# Altium PCB atWork_Main.PcbDoc
Units mm, origin at the board's own origin, x right, y up, seen from the top; angles counter-clockwise.
Board outline 104.27 x 85.85 mm, 2 copper layers (Top Layer, Bottom Layer); 62 components, 117 nets, 342 pads, 45 vias.
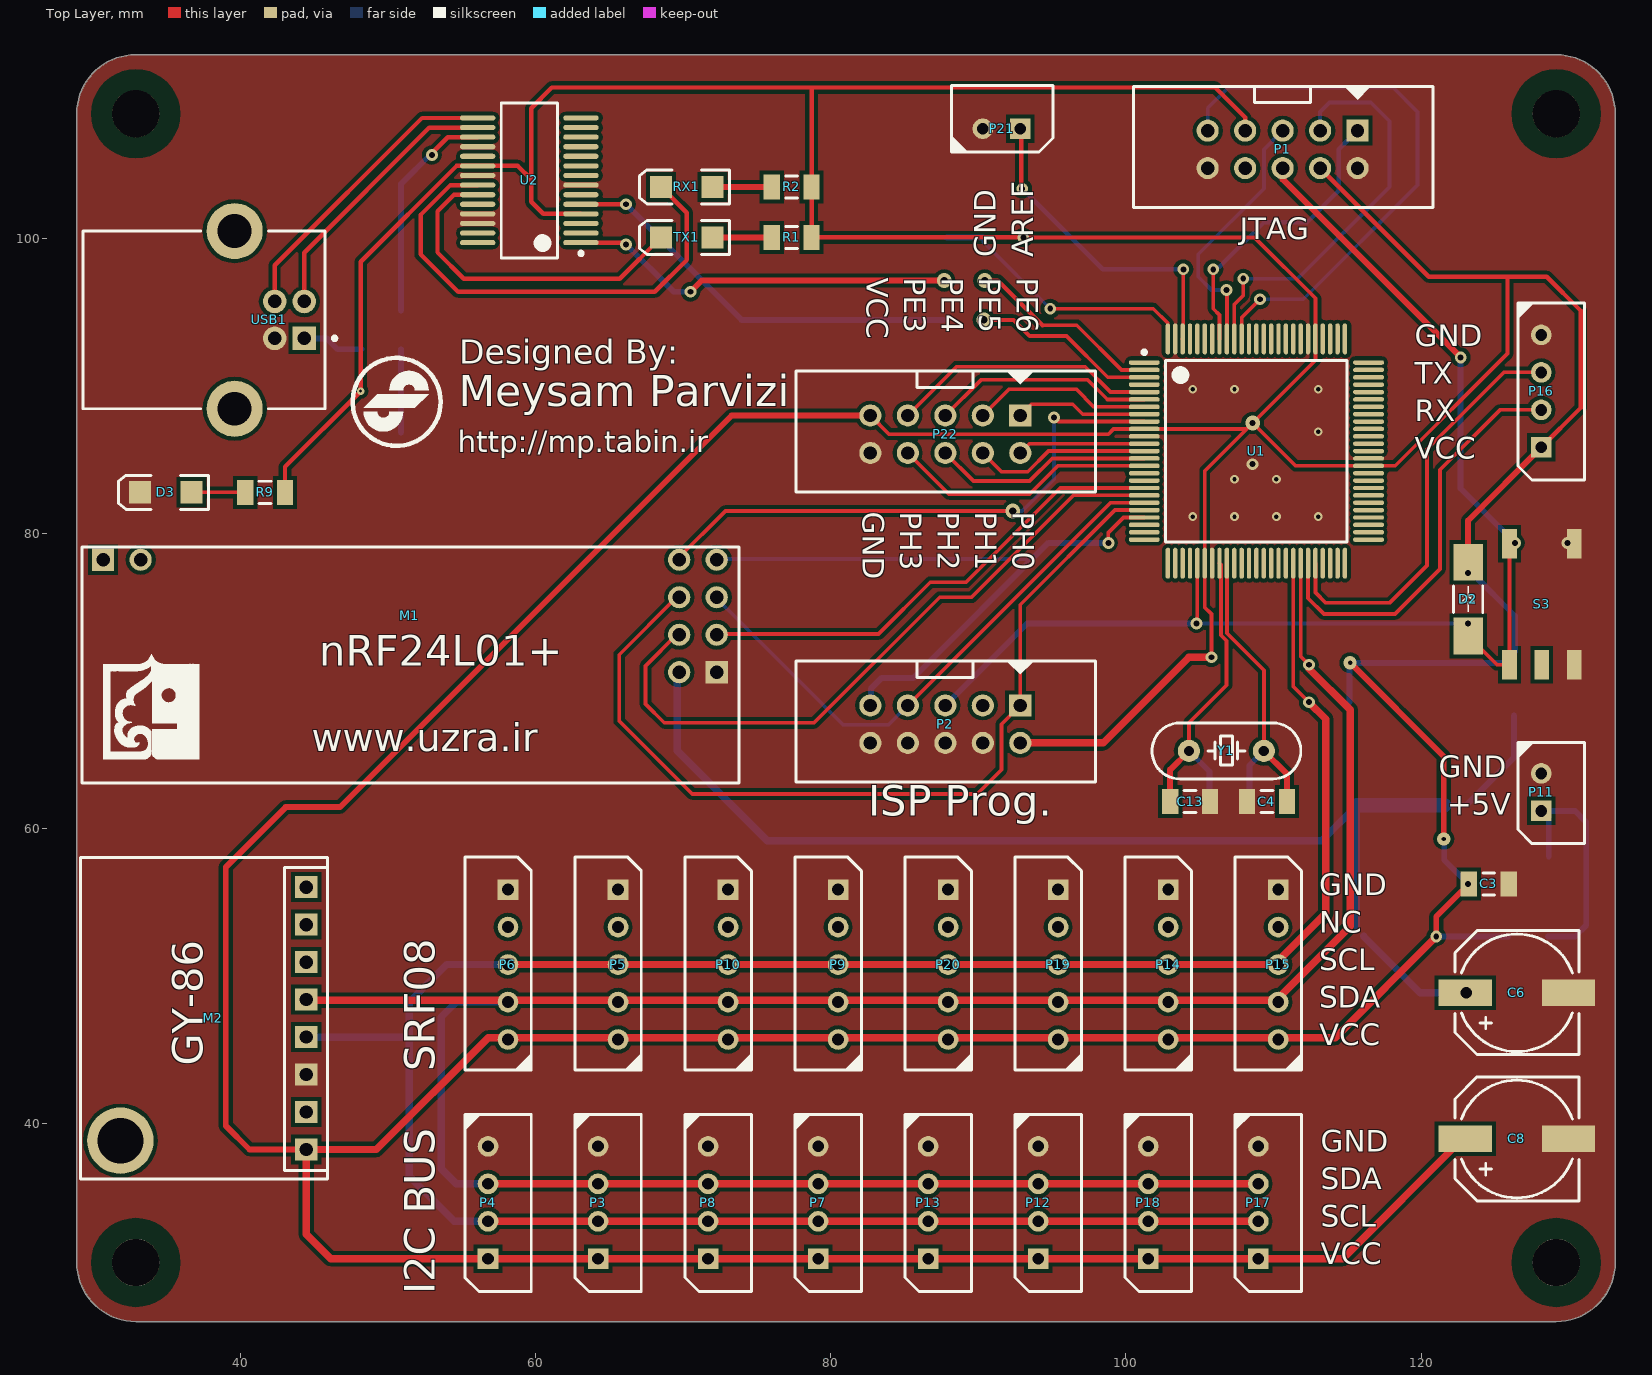
[diagram p0: Top Layer view]
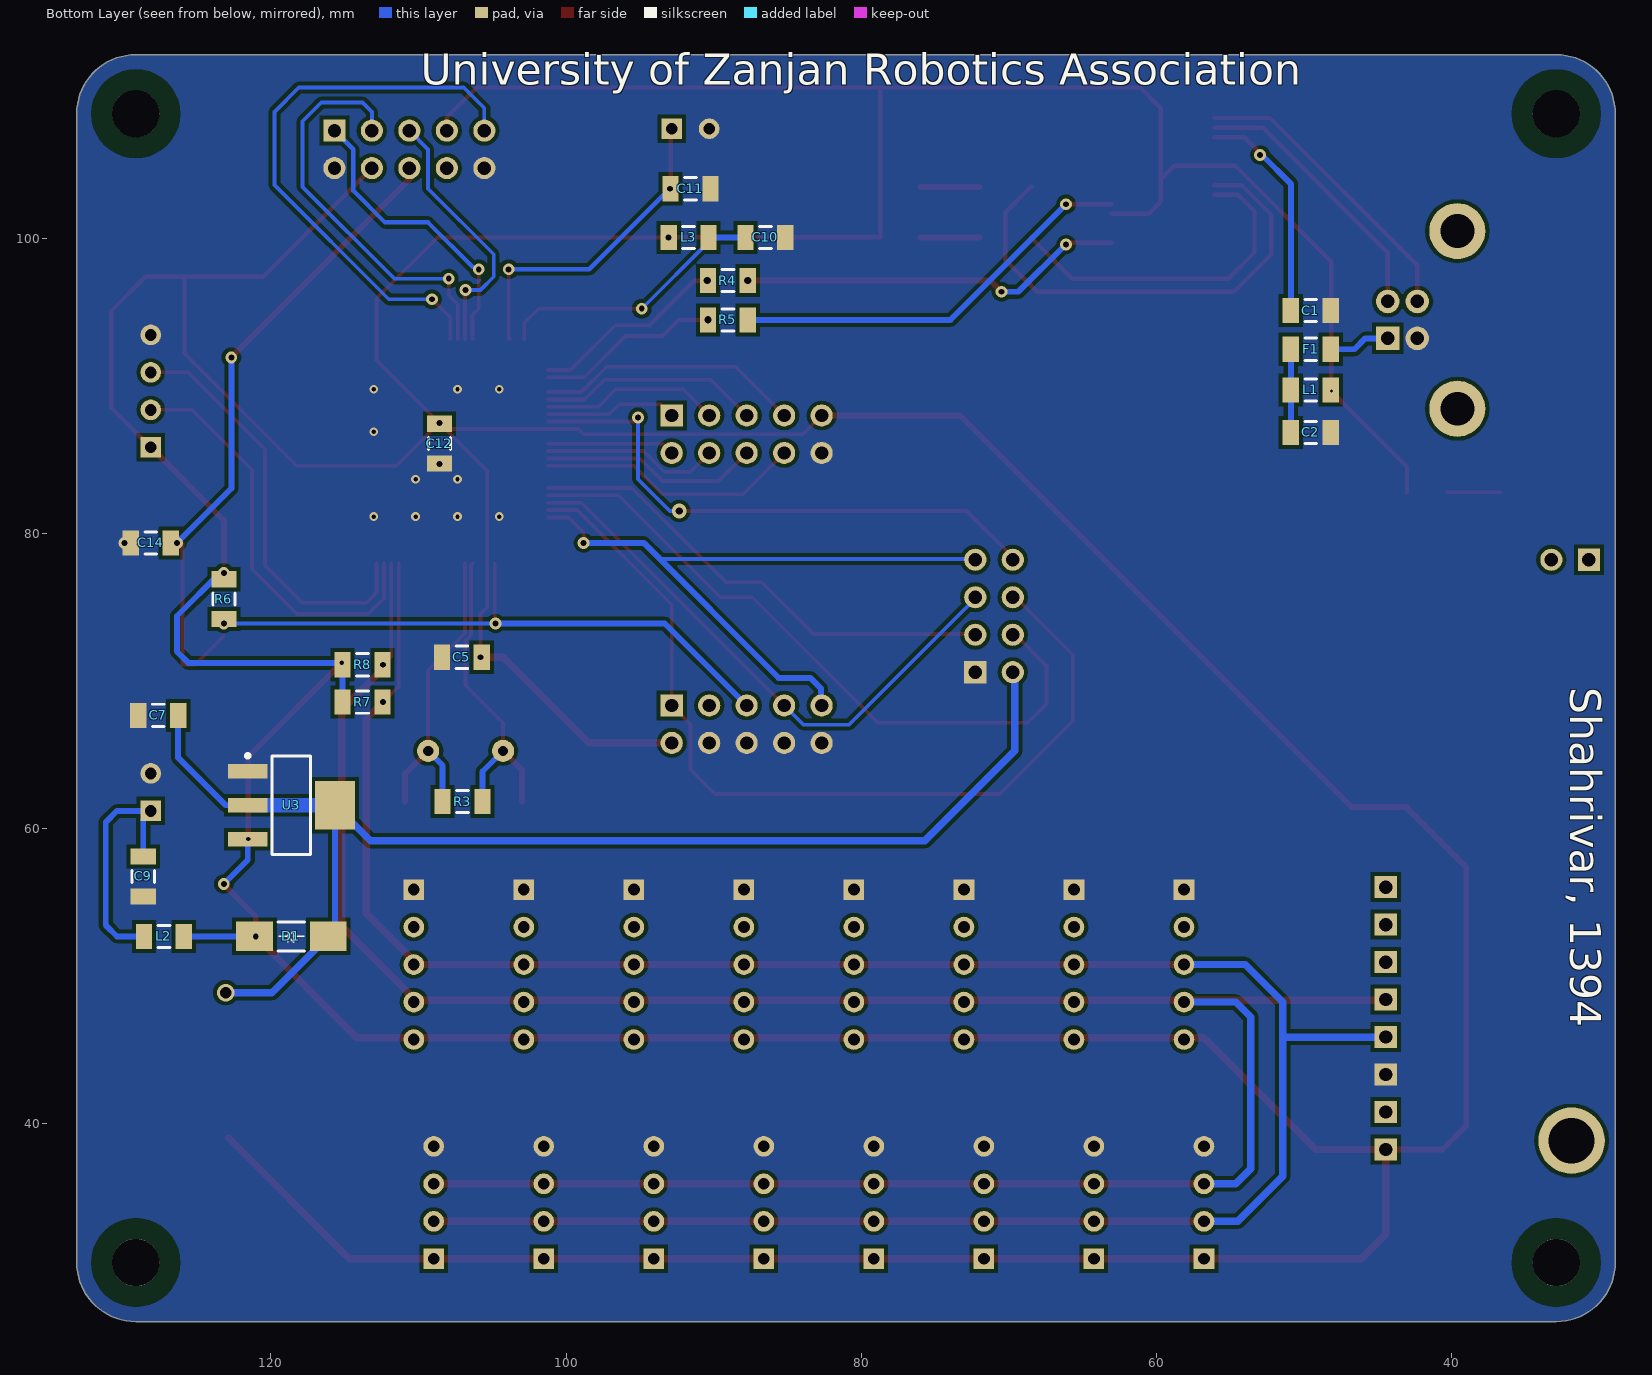
[diagram p1: Bottom Layer view, seen from below]

## Layer stack, top to bottom
Top Solder: solder mask 0.0102, Solder Resist, Dk 3.5
Top Layer: signal copper 0.0356
Dielectric 1: dielectric 0.32, FR-4, Dk 4.8
Bottom Layer: signal copper 0.0356
Bottom Solder: solder mask 0.0102, Solder Resist, Dk 3.5

## Board outline
28.893,30.607 28.893,108.458 cw(c32.893,108.458) 32.893,112.458 129.159,112.458 cw(c129.159,108.458) 133.159,108.458 133.159,30.607 cw(c129.159,30.607) 129.159,26.607 32.893,26.607 cw(c32.893,30.607)

## Design rules (kind name [scope] priority, off if disabled: settings)
Clearance [All] p1: gap=0.254
PolygonConnect [All] p1: connectstyle=Direct reliefconductorwidth=0.254 reliefentries=4 polygonreliefangle="90 Angle" airgapwidth=0.254
RoutingVias [All] p1: holewidth=0.711 width=1.27 viastyle="Through Hole" minholewidth=0.711 minwidth=1.27 maxholewidth=0.711 maxwidth=1.27
SolderMaskExpansion [All] p1: expansion=0.102
Width [All] p1: maxlimit=2 minlimit=0.254 preferedwidth=0.7 minimp=50.000000 maximp=50.000000 favimp=50.000000
30 further rules are at their usual default settings.

## Components (designator, comment, footprint, x,y, rotation, side; value= is the part's Value field where it differs from the comment)
C1 "Cap Semi" C1206 49.53,95.123 r180 bottom
C2 "Cap Semi" C1206 49.53,86.868 r0 bottom
C3 "Cap Semi" C1206 124.587,56.261 r180 top
C4 "Cap" C1206 109.554,61.849 r0 top
C5 "Cap" C1206 107.061,71.628 r180 bottom
C6 "Cap Pol1" CAP-SMD1 126.492,48.895 r180 top
C7 "Cap" C1206 127.635,67.691 r180 bottom
C8 "Cap Pol1" CAP-SMD1 126.492,38.989 r180 top
C9 "Cap" C1206 128.651,56.769 r90 bottom
C10 "Cap" C1206 86.487,100.076 r0 bottom
C11 "Cap" C1206 91.567,103.378 r0 bottom
C12 "Cap" C1206 108.585,86.106 r90 bottom
C13 "Cap" C1206 104.347,61.849 r180 top
C14 "Cap" C1206 128.143,79.375 r180 bottom
D1 "Diode 1N4007" DIODE-SMD 118.618,52.705 r0 bottom
D2 "Diode 1N4007" DIODE-SMD 123.19,75.565 r90 top
D3 "LED2" 3.2X1.6X1.1 34.925,82.804 r180 top
F1 "Fuse 1" C1206 49.53,92.498 r0 bottom
L1 "Inductor Isolated" C1206 49.53,89.747 r180 bottom
L2 "Inductor" C1206 127.254,52.705 r180 bottom
L3 "Inductor" C1206 91.694,100.076 r0 bottom
M1 "nRF24L01+" NRF24L01+ 72.263,70.612 r180 top
M2 "GY-86" GY-86 44.45,38.264 r90 top
P1 "JTAG" BOX2X5 110.617,107.315 r180 top
P2 "Programmer" BOX2X5 87.757,68.359 r180 top
P3 "I2C" XH4PIN 64.226,30.861 r270 top
P4 "I2C" XH4PIN 56.769,30.861 r270 top
P5 "SRF08" XH5PIN 65.576,55.88 r90 top
P6 "SRF08" XH5PIN 58.119,55.88 r90 top
P7 "I2C" XH4PIN 79.139,30.861 r270 top
P8 "I2C" XH4PIN 71.682,30.861 r270 top
P9 "SRF08" XH5PIN 80.49,55.88 r90 top
P10 "SRF08" XH5PIN 73.033,55.88 r90 top
P11 "Digital Power" XH2PIN 128.143,61.214 r270 top
P12 "I2C" XH4PIN 94.053,30.861 r270 top
P13 "I2C" XH4PIN 86.596,30.861 r270 top
P14 "SRF08" XH5PIN 102.86,55.88 r90 top
P15 "SRF08" XH5PIN 110.316,55.88 r90 top
P16 "UART" XH4PIN 128.143,85.852 r270 top
P17 "I2C" XH4PIN 108.966,30.861 r270 top
P18 "I2C" XH4PIN 101.509,30.861 r270 top
P19 "SRF08" XH5PIN 95.403,55.88 r90 top
P20 "SRF08" XH5PIN 87.946,55.88 r90 top
P21 "ADC REF" XH2PIN 92.837,107.442 r0 top
P22 "Box 5X2" BOX2X5 87.757,88.011 r180 top
R1 "Res3" C1206 77.343,100.076 r0 top
R2 "Res3" C1206 77.343,103.505 r0 top
R3 "Res1" C1206 107.014,61.849 r180 bottom
R4 "Res1" C1206 89.027,97.155 r0 bottom
R5 "Res1" C1206 89.027,94.488 r180 bottom
R6 "Res1" C1206 123.19,75.565 r270 bottom
R7 "Res1" C1206 113.792,68.58 r180 bottom
R8 "Res1" C1206 113.792,71.12 r180 bottom
R9 "Res1" C1206 41.656,82.804 r0 top
RX1 "LED2" 3.2X1.6X1.1 70.231,103.505 r180 top
S3 "SW-PB" PUSH1 125.984,71.12 r90 top
TX1 "LED2" 3.2X1.6X1.1 70.231,100.076 r180 top
U1 "ATmega2560-16AU" 100A_M 108.839,85.598 r0 top
U2 "FT232RL-Reel" SSOP-28_M 59.563,103.949 r180 top
U3 "LM1117MP-3.3" MP04A_M 118.618,61.595 r180 bottom
USB1 "440119-1" USB-B 43.307,94.488 r180 top
Y1 "XTAL" XTAL 106.807,65.278 r180 top

## Footprints (in the part's own frame and the unit in brackets; to place one, negate y for a bottom-side part, rotate by r counter-clockwise, add the part's x,y. Pads: shape width x height; smd on the part's side, far side on the other; paste and mask are expansions set on the pad)
3.2X1.6X1.1 [mm] "SMT LED; 2 Flat Leads"
  rect 1.5x1.5 smd: 1(-1.75,0) 2(1.75,0)
  silkscreen extent -2.9,-1.15 3.2,1.15
100A_M [mm] "Thin QFP, 100-Leads, Body 14x14mm, Pitch 0.5mm, IPC Low Density"
  oval 2.1x0.3 smd: 1(-7.6,6) 2(-7.6,5.5) 3(-7.6,5) 4(-7.6,4.5) 5(-7.6,4) 6(-7.6,3.5) 7(-7.6,3) 8(-7.6,2.5) 9(-7.6,2) 10(-7.6,1.5) 11(-7.6,1) 12(-7.6,0.5) 13(-7.6,0) 14(-7.6,-0.5) 15(-7.6,-1) 16(-7.6,-1.5) 17(-7.6,-2) 18(-7.6,-2.5) 19(-7.6,-3) 20(-7.6,-3.5) 21(-7.6,-4) 22(-7.6,-4.5) 23(-7.6,-5) 24(-7.6,-5.5) 25(-7.6,-6) 51(7.6,-6) 52(7.6,-5.5) 53(7.6,-5) 54(7.6,-4.5) 55(7.6,-4) 56(7.6,-3.5) 57(7.6,-3) 58(7.6,-2.5) 59(7.6,-2) 60(7.6,-1.5) 61(7.6,-1) 62(7.6,-0.5) 63(7.6,0) 64(7.6,0.5) 65(7.6,1) 66(7.6,1.5) 67(7.6,2) 68(7.6,2.5) 69(7.6,3) 70(7.6,3.5) 71(7.6,4) 72(7.6,4.5) 73(7.6,5) 74(7.6,5.5) 75(7.6,6)
  oval 0.3x2.1 smd: 26(-6,-7.6) 27(-5.5,-7.6) 28(-5,-7.6) 29(-4.5,-7.6) 30(-4,-7.6) 31(-3.5,-7.6) 32(-3,-7.6) 33(-2.5,-7.6) 34(-2,-7.6) 35(-1.5,-7.6) 36(-1,-7.6) 37(-0.5,-7.6) 38(0,-7.6) 39(0.5,-7.6) 40(1,-7.6) 41(1.5,-7.6) 42(2,-7.6) 43(2.5,-7.6) 44(3,-7.6) 45(3.5,-7.6) 46(4,-7.6) 47(4.5,-7.6) 48(5,-7.6) 49(5.5,-7.6) 50(6,-7.6) 76(6,7.6) 77(5.5,7.6) 78(5,7.6) 79(4.5,7.6) 80(4,7.6) 81(3.5,7.6) 82(3,7.6) 83(2.5,7.6) 84(2,7.6) 85(1.5,7.6) 86(1,7.6) 87(0.5,7.6) 88(0,7.6) 89(-0.5,7.6) 90(-1,7.6) 91(-1.5,7.6) 92(-2,7.6) 93(-2.5,7.6) 94(-3,7.6) 95(-3.5,7.6) 96(-4,7.6) 97(-4.5,7.6) 98(-5,7.6) 99(-5.5,7.6) 100(-6,7.6)
  silkscreen extent -7.72,-6.15 6.15,6.82, body extent -7,-7 7,7, height 1.2
BOX2X5 [mm] "Box Header; 5x2 Position"
  rect 1.5x1.5 hole 0.9: 1(-5.08,0)
  round 1.5 hole 0.9: 2(-5.08,2.54) 3(-2.54,0) 4(-2.54,2.54) 5(0,0) 6(0,2.54) 7(2.54,0) 8(2.54,2.54) 9(5.08,0) 10(5.08,2.54)
  silkscreen extent -10.18,-3 10.12,5.2, body extent -10.18,-3 10.12,5.2, height 9
C1206 [mm] "Chip Capacitor, Body 3.2x1.6mm, IPC High Density"
  rect 1.1x1.7 smd: 1(-1.35,0) 2(1.35,0)
  silkscreen extent -0.4,-0.75 0.4,0.75, body extent -1.7,-0.9 1.7,0.9, height 1.3
CAP-SMD1 [mm] "SMD Electrolyte Capacitor; 2 Leads; 100uF; 25V"
  rect 3.6x1.8 smd: 1(3.5,0) 2(-3.5,0)
  silkscreen extent -4.2,-4.2 4.2,4.2
DIODE-SMD [mm] "1N5822; SS34 Schottkey Diode"
  rect 2.5x2 smd: 1(-2.5,0) 2(2.5,0)
  silkscreen extent -0.9,-0.99 0.9,0.99
GY-86 [mm] "GY-86 IMU (10DOF MS5611 HMC5883L MPU6050)"
  round 4.5 hole 3.1: 0(0.6,12.6)
  rect 1.5x1.5 hole 0.9: 1(0,0) 2(2.54,0) 3(5.08,0) 4(7.62,0) 5(10.16,0) 6(12.7,0) 7(15.24,0) 8(17.78,0)
  silkscreen extent -2,-1.42 19.8,15.29, body extent -2,-1.42 19.8,15.29, height 12
MP04A_M [mm] "SOT223, 4-Leads, Body 6.5x3.5mm, Pitch 2.3mm, Lead Span 7mm, IPC Low Density"
  rect 2.7x1 smd: 1(-2.95,2.3) 2(-2.95,0) 3(-2.95,-2.3)
  rect 2.7x3.3 smd: 4(2.95,0)
  silkscreen extent -3.08,-3.35 1.3,3.47, body extent -1.85,-3.35 1.85,3.35, height 1.8
NRF24L01+ [mm] "nRF24L01 Single Chip 2.4GHz Tranceiver, +PA +LNA Ver5.1"
  round 1.5 hole 0.9: 0(39.04,-7.62) 2(2.54,0) 3(0,-2.54) 4(2.54,-2.54) 5(0,-5.08) 6(2.54,-5.08) 7(0,-7.62) 8(2.54,-7.62)
  rect 1.5x1.5 hole 0.9: 0(41.58,-7.62) 1(0,0)
  silkscreen extent -1.5,-8.5 43,7.5
PUSH1 [mm] "SMD Push Button; Arduino Uno Reset Button"
  rect 2x1 smd: 0(0,-2.2) 1(0,0) 1(8.2,0) 2(0,-4.4) 2(8.2,-4.4)
SSOP-28_M [mm] "SOP, 28-Leads, Body 10.2x5.3mm, Pitch 0.65mm, IPC Low Density"
  oval 2.4x0.35 smd: 1(-3.5,4.225) 2(-3.5,3.575) 3(-3.5,2.925) 4(-3.5,2.275) 5(-3.5,1.625) 6(-3.5,0.975) 7(-3.5,0.325) 8(-3.5,-0.325) 9(-3.5,-0.975) 10(-3.5,-1.625) 11(-3.5,-2.275) 12(-3.5,-2.925) 13(-3.5,-3.575) 14(-3.5,-4.225) 15(3.5,-4.225) 16(3.5,-3.575) 17(3.5,-2.925) 18(3.5,-2.275) 19(3.5,-1.625) 20(3.5,-0.975) 21(3.5,-0.325) 22(3.5,0.325) 23(3.5,0.975) 24(3.5,1.625) 25(3.5,2.275) 26(3.5,2.925) 27(3.5,3.575) 28(3.5,4.225)
  silkscreen extent -3.63,-5.25 1.9,5.25, body extent -2.8,-5.25 2.8,5.25, height 2
USB-B [mm] "Connector; USB1.1, Type B, Thru-Hole; 4 Position; Right Angle"
  rect 1.6x1.6 hole 0.92: 1(-1,1.25)
  round 1.6 hole 0.92: 2(-1,-1.25) 3(1,-1.25) 4(1,1.25)
  round 3.8 hole 2.3: 5(3.71,6.02) 6(3.71,-6.02)
  silkscreen extent -3.18,-6.02 13.99,6.02, body extent -3.04,-7.49 13.96,7.37, height 11.5
XH2PIN [mm] "XH 2 Pin Connector"
  rect 1.4x1.4 hole 0.8: 1(0,0)
  round 1.4 hole 0.8: 2(-2.54,0)
  silkscreen extent -4.65,-1.57 2.22,2.93
XH4PIN [mm] "XH 4 Pin Connector"
  rect 1.4x1.4 hole 0.8: 1(0,0)
  round 1.4 hole 0.8: 2(-2.54,0) 3(-5.08,0) 4(-7.62,0)
  silkscreen extent -9.78,-1.57 2.22,2.93
XH5PIN [mm] "XH 5 Pin Connector"
  rect 1.4x1.4 hole 0.8: 1(0,0)
  round 1.4 hole 0.8: 2(-2.54,0) 3(-5.08,0) 4(-7.62,0) 5(-10.16,0)
  silkscreen extent -12.22,-1.57 2.22,2.93
XTAL [mm] "Crystal, Thru Hole, 2 Leads"
  round 1.5 hole 0.7: 1(-2.54,0) 2(2.54,0)
  silkscreen extent -5.04,-1.91 5.04,1.91

## Part data
C1 C2 C3: "Capacitor (Semiconductor SIM Model)"
C4 C5 C7 C9 C10 C11 C12 C13 C14: "Capacitor"
C6 C8: "Polarized Capacitor (Radial)"
D1 D2: "1 Amp General Purpose Rectifier"
D3 RX1 TX1: "Typical RED, GREEN, YELLOW, AMBER GaAs LED"
F1: "Fuse"
L1: "Isolated Inductor"
M1: "nRF24L01 Single Chip 2.4GHz Tranceiver, +PA +LNA Ver5.1"
M2: "GY-86 IMU (10DOF MS5611 HMC5883L MPU6050)"
P1 P2: library part "Box 5X2", "Box, 5-Pin, Dual row"
P3 P4 P7 P8 P12 P13 P16 P17 P18: library part "Header 4", "Header, 4-Pin"
P5 P6 P9 P10 P14 P15 P19 P20: library part "Header 5"
P11 P21: library part "Header 2", "Header, 2-Pin"
P22: "Box, 5-Pin, Dual row"
R1 R2 R3 R4 R5 R6 R7 R8 R9: "Resistor"
S3: "Switch"
U1: "8-bit AVR Microcontroller, 4.5-5.5V, 256KB Flash, 4KB EEPROM, 8KB SRAM, 86 GPIO pins, 100-pin TQFP, Industrial Grade (-40°C to 85°C), Pb-Free"
U2: "USB UART Asynchronous Serial Data Transfer Chip, 28-pin SSOP, Tape and Reel"
U3: "800mA Low-Dropout Linear Regulator, 4-pin SOT-223"
USB1: "USB 1.1, Right Angle, Thru-Hole, B Type, Receptacle, 4 Position, Beige"
Y1: "Crystal Oscillator"

## Free pads (board coordinates)
  round 3.2 hole 3.2: 0(32.893,30.607) 0(32.893,108.458) 0(129.159,30.607) 0(129.159,108.458)

## Via types
v1: diameter 0.8, hole 0.4, Top Layer to Bottom Layer, 26 vias
v2: diameter 0.6, hole 0.3, Top Layer to Bottom Layer, 10 vias
v3: diameter 1, hole 0.5, Top Layer to Bottom Layer, 4 vias
v4: diameter 0.9, hole 0.3, Top Layer to Bottom Layer, 2 vias
v5: diameter 1.2, hole 0.8, Top Layer to Bottom Layer, 1 vias
v6: diameter 1, hole 0.4, Top Layer to Bottom Layer, 1 vias
v7: diameter 0.5, hole 0.2, Top Layer to Bottom Layer, 1 vias

## Nets (pads, with @x,y where several pads share a name; then routed paths per layer and width w, separated by ;. In a path a pad name is that pad's centre, name@x,y a point inside that pad or via, vN(x,y) a via of type N, cw(c..) or ccw(c..) an arc to the next point about the centre after c; other vN are vias at no path point)
3V3: C6.1 C7.2 D1.1 M1.2 U3.2 U3.4 | length 86.8
  Bottom Layer w0.4: D1.1@115.668,53.155 U3.4 ; U3.2 123.063,61.595 126.285,64.817 C7.2
  Bottom Layer w0.5: M1.2@69.596,70.659 69.596,65.278 75.692,59.182 113.255,59.182 U3.4 ; D1.1 119.928,48.895 v5(123.063,48.895)
  Bottom Layer w1: U3.4 U3.2
5V: C9.2 L2.1 P11.1 | length 16.6
  Bottom Layer w0.4: L2.1 130.429,52.705 131.191,53.467 131.191,60.452 130.429,61.214 P11.1 128.651,60.706 C9.2
ADC0: U1.97
ADC1: U1.96
ADC2: U1.95
ADC3: U1.94
ALE: U1.70
AREF: C11.2 P21.1 U1.98 | length 21.9
  Top Layer w0.254: U1.98 103.886,93.245 v1(103.886,97.917)
  Top Layer w0.3: v1@92.917,103.378 P21.1@92.917,107.362
  Bottom Layer w0.3: v1(92.964,103.378) 98.425,97.917 v1(103.886,97.917)
CBUS2: U2.13
CBUS3: U2.14
CBUS4: U2.12
CE: M1.3 U1.18 | length 33.2
  Top Layer w0.254: M1.3@72.136,73.199 83.232,73.199 86.741,76.708 89.154,76.708 95.544,83.098 U1.18
CTS: U2.11
DCD: U2.10
DSR: U2.9
DTR: U2.2
FRESET: U2.19
FRX: R5.2 U2.5 | length 27.8
  Top Layer w0.3: U2.5 v1(66.111,102.324)
  Bottom Layer w0.4: v1(66.111,102.324) 73.947,94.488 R5.2@87.63,94.488
FTX: R4.1 U2.1 | length 26.4
  Top Layer w0.3: U2.1 v1@66.111,99.724
  Top Layer w0.4: v1(70.485,96.393) 71.247,97.155 v3(87.677,97.155) ; v3(87.677,97.155) 87.804,97.155 v3(87.677,97.155)
  Bottom Layer w0.4: v1@66.188,99.547 69.342,96.393 v1(70.485,96.393)
  other v1: 66.111,99.597
GND: C1.2 C2.1 C3.1 C4.1 C5.1 C6.2 C7.1 C8.2 C9.1 C10.1 C11.1 C12.1 C13.1 C14.1 D3.2 M1.1 M2.3 P1.2 P1.10 P2.4 P2.6 P2.8 P2.10 P3.4 P4.4 P5.1 P6.1 P7.4 P8.4 P9.1 P10.1 P11.2 P12.4 P13.4 P14.1 P15.1 P16.4 P17.4 P18.4 P19.1 P20.1 P21.2 P22.10 S3.2 U1.11 U1.32 U1.62 U1.81 U1.99 U2.7 U2.18 U2.21 U2.25 U2.26 U3.1 USB1.4
  other v1: 129.921,79.375 108.585,84.709
  other v2: 104.521,81.153 107.357,81.153 110.194,81.153 113.03,81.153 107.357,83.693 110.194,83.693 113.03,86.91 104.521,89.789 107.357,89.789 113.03,89.789
ICP1: U1.47
IRQ: M1.8 U1.9 | length 38.2
  Top Layer w0.254: M1.8@69.596,78.279 72.851,81.534 v3@92.285,81.534 ; v1(95.123,87.884) 95.409,87.598 U1.9
  Bottom Layer w0.254: v3(92.329,81.534) 92.964,81.534 95.123,83.693 v1(95.123,87.884)
MISO: M1.7 P2.9 U1.22 | length 46.2
  Top Layer w0.254: v1(98.806,79.375) 98.806,80.074 99.83,81.098 U1.22
  Bottom Layer w0.254: M1.7@72.136,78.279 93.472,78.279
  Bottom Layer w0.4: P2.9 82.709,68.391 82.709,69.501 83.439,70.231 85.598,70.231 94.742,79.375 v1(98.806,79.375)
MOSI: M1.6 P2.1 U1.21 | length 61.5
  Top Layer w0.254: M1.6@69.596,75.739 65.659,71.802 65.659,67.31 70.612,62.357 89.916,62.357 91.567,64.008 91.567,67.089 P2.1 92.837,75.184 99.251,81.598 U1.21
NetC1_1: C1.1 U2.17 | length 15.2
  Top Layer w0.3: v1(52.959,105.664) 52.959,105.791 54.042,106.874 U2.17
  Bottom Layer w0.4: C1.1 50.88,103.712 52.832,105.664 v1(52.959,105.664)
NetC2_2: C2.2 F1.2 L1.1 | length 5.6
  Bottom Layer w0.4: C2.2 L1.1 F1.2
NetC4_2: C4.2 R3.1 U1.34 Y1.1 | length 21.7
  Top Layer w0.254: U1.34 106.839,73.247 109.347,70.739 Y1.1
  Top Layer w0.4: Y1.1 110.904,63.721 C4.2
  Bottom Layer w0.4: R3.1 108.364,64.295 Y1.1
NetC10_2: C10.2 L3.1 U1.100 | length 18.7
  Top Layer w0.254: v1(94.869,95.25) 101.854,95.25 102.839,94.265 U1.100
  Bottom Layer w0.254: L3.1 90.344,99.775 v1(94.869,95.25)
  Bottom Layer w0.4: C10.2@87.837,100.076 L3.1
NetC13_2: C13.2 R3.2 U1.33 Y1.2 | length 21.9
  Top Layer w0.254: Y1.2 104.267,67.183 106.807,69.723 106.807,72.74 106.435,73.112 106.435,77.902 U1.33
  Top Layer w0.4: C13.2 102.997,64.008 Y1.2
  Bottom Layer w0.4: Y1.2 105.664,63.881 R3.2
NetD3_1: D3.1 R9.1 | length 3.6
  Top Layer w0.254: D3.1 R9.1
NetF1_1: F1.1 USB1.1 | length 4.2
  Bottom Layer w0.4: USB1.1 45.827,93.238 46.567,92.498 F1.1
NetR1_1: R1.1 TX1.1 | length 4
  Top Layer w0.4: TX1.1 R1.1
NetR2_1: R2.1 RX1.1 | length 4
  Top Layer w0.4: RX1.1 R2.1
NetR4_2: R4.2 U1.2 | length 13.3
  Top Layer w0.254: 94.341,94.127 96.667,94.127 99.695,91.098 U1.2
  Top Layer w0.3: v3(90.424,97.155) 91.313,97.155 94.341,94.127
NetR5_1: R5.1 U1.3 | length 12.5
  Top Layer w0.254: v3(90.377,94.488) 92.376,94.488 93.472,93.392 95.965,93.392 98.759,90.598 U1.3
NetRX1_2: RX1.2 U2.22 | length 33
  Top Layer w0.3: U2.22 54.221,103.624 52.197,101.6 52.197,98.933 54.737,96.393 68.072,96.393 70.231,98.552 70.231,101.755 RX1.2
NetTX1_2: TX1.2 U2.23 | length 23
  Top Layer w0.3: U2.23 54.46,102.974 53.34,101.854 53.34,99.06 55.118,97.282 65.687,97.282 TX1.2
NetU2_15: U2.15 USB1.3 | length 20.3
  Top Layer w0.3: USB1.3 42.307,98.187 52.294,108.174 U2.15
NetU2_16: U2.16 USB1.2 | length 18.6
  Top Layer w0.3: USB1.2 44.307,99.044 52.787,107.524 U2.16
OC0A: U1.26
OC0B: U1.1
OC1A: U1.24
OC1B: U1.25
OC2A: U1.23
OC3A: P22.7 U1.5 | length 18.1
  Top Layer w0.254: P22.7 88.519,91.313 97.238,91.313 98.945,89.606 ; 98.953,89.598 U1.5
OC3B: P22.5 U1.6 | length 15
  Top Layer w0.254: P22.5 90.17,90.424 97.409,90.424 98.727,89.106 ; 98.727,89.098 U1.6
OC3C: P22.3 U1.7 | length 12.2
  Top Layer w0.254: P22.3 92.075,89.789 96.647,89.789 97.79,88.598 U1.7
OC4A: P22.8 U1.15 | length 18
  Top Layer w0.254: P22.8 88.011,82.677 93.472,82.677 95.393,84.598 U1.15
OC4B: U1.16
OC4C: U1.17
PA0: U1.78
PA1: U1.77
PA2: U1.76
PA3: U1.75
PA4: U1.74
PA5: U1.73
PA6: U1.72
PA7: U1.71
PC0: U1.53
PC1: U1.54
PC2: U1.55
PC3: U1.56
PC4: U1.57
PC5: U1.58
PC6: U1.59
PC7: U1.60
PJ0: U1.63
PJ1: U1.64
PJ2: U1.65
PJ3: U1.66
PJ4: U1.67
PJ5: U1.68
PJ6: U1.69
PJ7: U1.79
PK0: U1.89
PK1: U1.88
PK2: U1.87
PK3: U1.86
PK4: U1.85
PK5: U1.84
PK6: U1.83
PK7: U1.82
PL0: U1.35
PL1: U1.36
PL2: U1.37
PL3: U1.38
PL4: U1.39
PL5: U1.40
PL6: U1.41
PL7: U1.42
RD: U1.52
RESET: C14.2 D2.1 P1.6 P2.5 R6.2 S3.1 U1.30 | length 85.5
  Top Layer w0.254: v1@104.839,73.978 U1.30 ; 110.617,104.013 P1.6 ; D2.1 125.135,71.12 125.984,71.12 S3.1@125.984,79.32
  Top Layer w0.4: 110.617,104.013 v1(122.682,91.948)
  Bottom Layer w0.3: v1(104.775,73.914) v1(123.19,73.914)
  Bottom Layer w0.4: P2.5 93.312,73.914 v1(104.775,73.914) ; v1(122.682,91.948) 122.682,83.058 v1(126.365,79.375)
RI: U2.6
RTS: U2.3
RX: P16.2 U1.45 | length 28.3
  Top Layer w0.254: U1.45 112.339,75.621 113.411,74.549 118.237,74.549 121.285,77.597 121.285,84.328 125.349,88.392 P16.2
RXD2: P22.2 U1.12 | length 8.7
  Top Layer w0.254: P22.2 93.464,86.098 U1.12
SCK: M1.5 P2.7 U1.20 | length 38.9
  Top Layer w0.254: P2.7 98.956,82.098 U1.20
  Bottom Layer w0.254: M1.5@72.136,75.739 80.819,67.056 83.914,67.056 P2.7
SCL: M2.4 P3.2 P4.2 P5.3 P6.3 P7.2 P8.2 P9.3 P10.3 P12.2 P13.2 P14.3 P15.3 P17.2 P18.2 P19.3 P20.3 R7.2 U1.43 | length 166.9
  Top Layer w0.254: P15.3@110.189,50.927 P15.3@110.316,51.054 ; U1.43 111.339,69.636 v1(112.395,68.58)
  Top Layer w0.5: P4.2 P3.2 P8.2 P7.2 P13.2 P12.2 P18.2 P17.2 ; P6.3 P15.3@110.189,50.8 ; P15.3 110.316,51.054 113.538,54.276 113.538,67.437 v1(112.395,68.58)
  Bottom Layer w0.5: M2.4 51.345,45.884 ; P4.2 54.483,33.401 51.435,36.449 51.435,48.26 53.975,50.8 P6.3
SDA: M2.5 P3.3 P4.3 P5.4 P6.4 P7.3 P8.3 P9.4 P10.4 P12.3 P13.3 P14.4 P15.4 P17.3 P18.3 P19.4 P20.4 R8.2 U1.44 | length 169.6
  Top Layer w0.254: U1.44 111.839,71.676 v1(112.395,71.12)
  Top Layer w0.5: M2.5 44.487,48.387 110.189,48.387 115.189,53.387 115.189,68.072 v1@112.395,70.866 ; P4.3 P3.3 P8.3 P7.3 P13.3 P12.3 P18.3 P17.3
  Bottom Layer w0.5: P4.3 54.61,35.941 53.594,36.957 53.594,47.244 54.61,48.26 P6.4
SS: M1.4 U1.19 | length 46.4
  Top Layer w0.254: M1.4@69.596,73.199 67.437,71.04 67.437,68.453 68.707,67.183 78.867,67.183 87.376,75.692 89.535,75.692 96.441,82.598 U1.19
T0: U1.50
T1: U1.49
T3: P22.1 U1.8 | length 9
  Top Layer w0.254: P22.1 93.599,88.773 96.393,88.773 97.068,88.098 U1.8
T4: U1.27
TCK: P1.1 U1.93 | length 19.7
  Top Layer w0.254: v1(105.918,97.917) 105.918,95.25 106.339,94.829 U1.93
  Bottom Layer w0.3: 106.339,98.084 109.347,101.092 112.268,101.092 114.427,103.251 114.427,106.045 P1.1
TDI: P1.9 U1.90 | length 39
  Top Layer w0.254: U1.90 107.839,94.631 v1(109.093,95.885)
  Bottom Layer w0.254: P1.9 105.537,108.839 106.934,110.236 118.11,110.236 119.761,108.585 119.761,103.632 112.014,95.885 v1(109.093,95.885)
TDO: P1.3 U1.91 | length 27.9
  Top Layer w0.254: U1.91 107.339,95.528 107.95,96.139 v1(107.95,97.282)
  Bottom Layer w0.254: v1@108.121,97.282 111.633,97.282 117.856,103.505 117.856,107.95 116.586,109.22 113.792,109.22 113.157,108.585 P1.3
TMS: P1.5 U1.92 | length 18
  Top Layer w0.254: v1(106.807,96.52) 106.839,96.488 U1.92
  Bottom Layer w0.254: v1@106.839,96.266 106.585,96.52 105.791,96.52 104.902,97.409 104.902,98.933 109.347,103.378 109.347,106.045 P1.5
TOSC1: U1.29
TOSC2: U1.28
TX: P16.3 U1.46 | length 28.7
  Top Layer w0.254: U1.46 112.839,76.01 113.538,75.311 117.856,75.311 120.396,77.851 120.396,85.725 125.603,90.932 P16.3
TXD2: P22.4 U1.13 | length 12
  Top Layer w0.254: P22.4 91.567,84.201 93.345,84.201 94.742,85.598 U1.13
VCC: C3.2 C5.2 C8.1 C12.2 D1.2 D2.2 L1.2 L2.2 L3.2 M2.1 P1.4 P1.7 P2.2 P3.1 P4.1 P5.5 P6.5 P7.1 P8.1 P9.5 P10.5 P12.1 P13.1 P14.5 P15.5 P16.1 P17.1 P18.1 P19.5 P20.5 P22.9 R1.2 R2.2 R6.1 R7.1 R8.1 R9.2 U1.10 U1.31 U1.61 U1.80 U2.4 U2.20 U3.3 | length 576
  Top Layer w0.254: P22.9 83.947,86.741 98.806,86.741 99.163,87.098 U1.10 108.18,87.098 ; v1@93.298,100.076 108.712,100.076 112.839,95.949 U1.80 112.839,91.757 v6(108.585,87.503) ; v1(105.791,71.628) 105.791,74.549 105.339,75.001 U1.31 105.339,84.257 108.18,87.098 ; 125.857,97.409 125.857,92.202 118.253,84.598 U1.61 111.49,84.598 v6(108.585,87.503) ; 108.18,87.098 v6(108.585,87.503)
  Top Layer w0.3: R9.2 43.006,84.535 v7(48.133,89.662) 48.133,98.425 54.632,104.924 U2.20 58.779,104.924 59.69,104.013 ; U2.4 60.505,101.674 59.69,102.489 59.69,104.013 ; 78.613,110.236 78.693,110.156 R2.2 R1.2 v1(93.044,100.076) ; P1.7 108.077,108.204 106.045,110.236 61.087,110.236 59.69,108.839 59.69,104.013 ; P1.4 120.523,97.409 125.857,97.409 128.524,97.409 130.81,95.123 130.81,88.519 P16.1
  Top Layer w0.4: M2.1 40.603,38.264 38.989,39.878 38.989,57.404 43.053,61.468 46.736,61.468 73.279,88.011 P22.9 ; v4(115.189,71.247) 121.539,64.897 v4(121.539,59.309) ; v1(121.031,52.705) 121.031,54.055 C3.2 ; D2.2 123.19,80.899 P16.1
  Top Layer w0.5: P2.2 98.458,65.819 104.267,71.628 v1(105.791,71.628) ; v1(121.031,52.705) 114.173,45.847 56.769,45.847 49.186,38.264 M2.1 44.45,32.512 46.101,30.861 P4.1 P3.1 P8.1 P7.1 P13.1 P12.1 P18.1 P17.1 114.681,30.861 C8.1@122.872,39.052
  Bottom Layer w0.4: R7.1 R8.1 R8.1@115.142,71.2 ; v4(115.189,71.247) 125.603,71.247 126.365,72.009 126.365,74.422 123.444,77.343 v1(123.19,77.343) ; D1.2 L2.2 ; U3.3 121.568,57.883 v1(123.19,56.261)
WR: U1.51
XCK0: U1.4
XCK1: U1.48
XCK2: P22.6 U1.14 | length 14.9
  Top Layer w0.254: P22.6 89.662,83.566 93.472,83.566 95.004,85.098 U1.14
pads on no net: M1.0 M2.0 M2.2 M2.6 M2.7 M2.8 P1.8 P2.3 P5.2 P6.2 P9.2 P10.2 P14.2 P15.2 P19.2 P20.2 S3.0 U2.8 U2.24 U2.27 U2.28 USB1.5 USB1.6

## Polygon pours and split planes (outlines as drawn)
GND on Top Layer "Mechanical 1-No Net" (solid, pour order 2): 28.893,30.607 28.893,108.458 cw(c32.893,108.458) 32.893,112.458 129.159,112.458 cw(c129.159,108.458) 133.159,108.458 133.159,30.607 cw(c129.159,30.607) 129.159,26.607 32.893,26.607 cw(c32.893,30.607)
GND on Bottom Layer "Mechanical 1-No Net" (solid, pour order 4): 28.893,30.607 28.893,108.458 cw(c32.893,108.458) 32.893,112.458 129.159,112.458 cw(c129.159,108.458) 133.159,108.458 133.159,30.607 cw(c129.159,30.607) 129.159,26.607 32.893,26.607 cw(c32.893,30.607)

## Other copper
Top Layer:
  pour cut-out: 35.902,30.607 cw(c32.893,30.607) 32.893,27.598 cw(c32.893,30.607) 29.884,30.607 cw(c32.893,30.607) 32.893,33.616 cw(c32.893,30.607)
  pour cut-out: 129.159,33.616 cw(c129.159,30.607) 132.168,30.607 cw(c129.159,30.607) 129.159,27.598 cw(c129.159,30.607) 126.15,30.607 cw(c129.159,30.607)
  pour cut-out: 126.15,108.458 cw(c129.159,108.458) 129.159,111.467 cw(c129.159,108.458) 132.168,108.458 cw(c129.159,108.458) 129.159,105.449 cw(c129.159,108.458)
  pour cut-out: 32.893,105.449 cw(c32.893,108.458) 29.884,108.458 cw(c32.893,108.458) 32.893,111.467 cw(c32.893,108.458) 35.902,108.458 cw(c32.893,108.458)
Bottom Layer:
  pour cut-out: 35.902,30.607 cw(c32.893,30.607) 32.893,27.598 cw(c32.893,30.607) 29.884,30.607 cw(c32.893,30.607) 32.893,33.616 cw(c32.893,30.607)
  pour cut-out: 129.159,33.616 cw(c129.159,30.607) 132.168,30.607 cw(c129.159,30.607) 129.159,27.598 cw(c129.159,30.607) 126.15,30.607 cw(c129.159,30.607)
  pour cut-out: 126.15,108.458 cw(c129.159,108.458) 129.159,111.467 cw(c129.159,108.458) 132.168,108.458 cw(c129.159,108.458) 129.159,105.449 cw(c129.159,108.458)
  pour cut-out: 32.893,105.449 cw(c32.893,108.458) 29.884,108.458 cw(c32.893,108.458) 32.893,111.467 cw(c32.893,108.458) 35.902,108.458 cw(c32.893,108.458)

## Silkscreen, mask and mechanical layers (free items; w line width, h text height)
Top Overlay:
  drawing of 2362 lines, arcs and shapes, not listed
  text "JTAG" at 107.696,99.441 h2.5
  text "GND" at 91.694,98.732 h2.5 r90
  text "AREF" at 94.234,98.732 h2.5 r90
  text "VCC" at 81.915,97.356 h2.5 r270
  text "PE3" at 84.455,97.356 h2.5 r270
  text "PE4" at 86.995,97.356 h2.5 r270
  text "PE5" at 89.535,97.356 h2.5 r270
  text "PE6" at 92.075,97.356 h2.5 r270
  text "GND" at 119.56,92.202 h2.5
  text "Designed By:" at 54.824,90.973 h2.8
  text "TX" at 119.56,89.662 h2.5
  text "Meysam Parvizi" at 54.797,87.925 h3.6
  text "RX" at 119.56,87.122 h2.5
  text "http://mp.tabin.ir" at 54.697,85.004 h2.5
  text "VCC" at 119.56,84.582 h2.5
  text "GND" at 81.661,81.481 h2.5 r270
  text "PH3" at 84.201,81.481 h2.5 r270
  text "PH2" at 86.741,81.481 h2.5 r270
  text "PH1" at 89.281,81.481 h2.5 r270
  text "PH0" at 91.821,81.481 h2.5 r270
  text "nRF24L01+" at 45.339,70.358 h3.5
  text "www.uzra.ir" at 44.831,64.643 h3.2
  text "GND" at 121.207,62.992 h2.5
  text "+5V" at 121.763,60.452 h2.5
  text "ISP Prog." at 82.55,60.198 h3.5
  text "GND" at 113.083,54.991 h2.5
  text "NC" at 113.083,52.451 h2.5
  text "SCL" at 113.083,49.911 h2.5
  text "SDA" at 113.083,47.371 h2.5
  text "VCC" at 113.083,44.831 h2.5
  text "GY-86" at 38.1,43.942 h3.5 r90
  text "SRF08" at 53.848,43.561 h3.5 r90
  text "GND" at 113.21,37.592 h2.5
  text "SDA" at 113.21,35.052 h2.5
  text "SCL" at 113.21,32.512 h2.5
  text "VCC" at 113.21,29.972 h2.5
  text "I2C BUS" at 53.848,28.448 h3.5 r90
Bottom Overlay:
  text "University of Zanjan Robotics Association" at 109.855,109.728 h3.6
  text "Shahrivar, 1394" at 32.639,69.596 h3.6 r90
Mechanical 1:
  the board outline again, w0.254